# Altium PCB Audio_output.PcbDoc
Units mm, origin at the board's own origin, x right, y up, seen from the top; angles counter-clockwise.
Board outline 45 x 50 mm, 2 copper layers (Top Layer, Bottom Layer); 11 components, 9 nets, 56 pads, 0 vias.
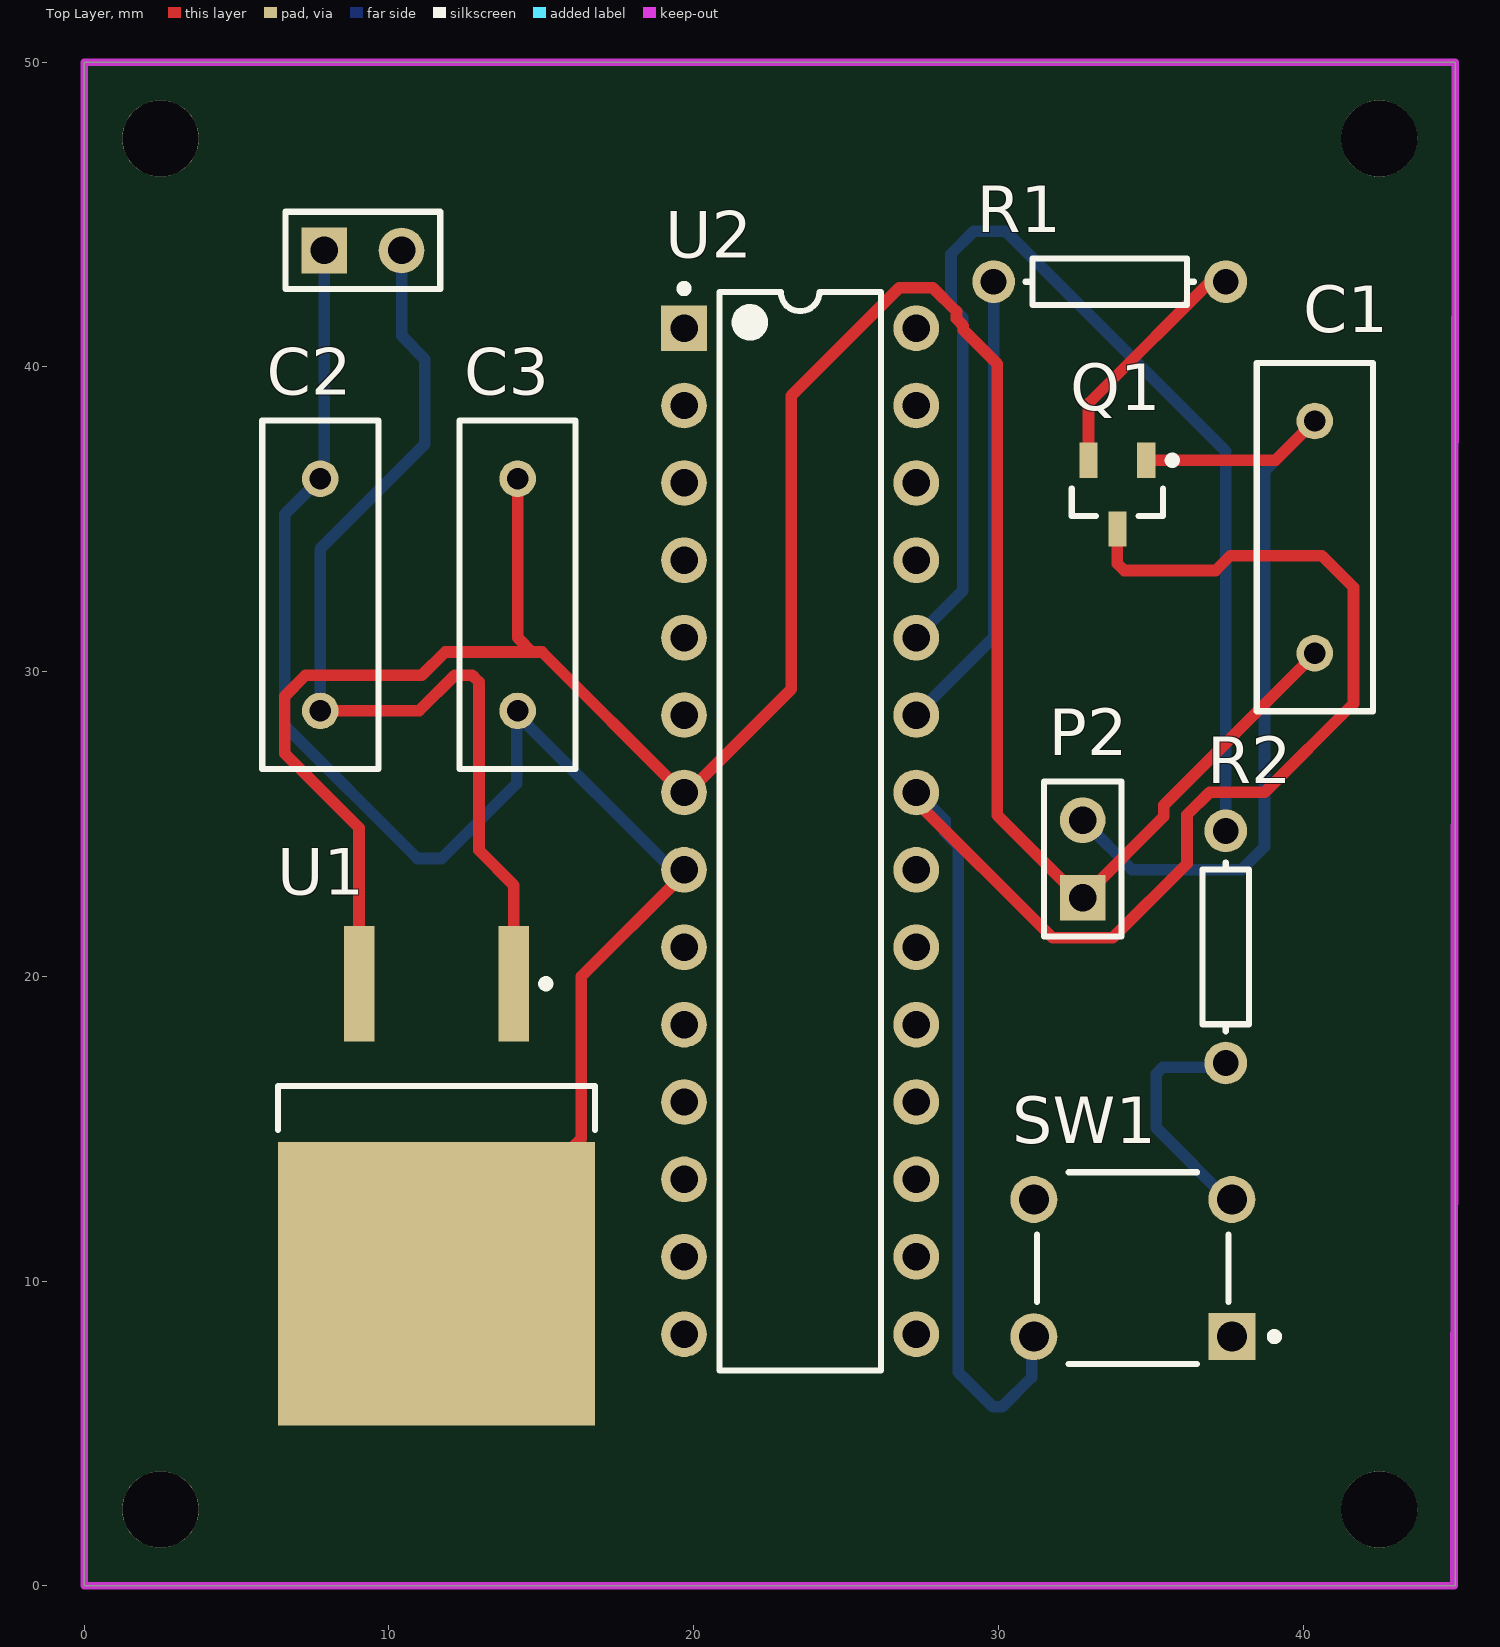
[diagram p0: Top Layer view]
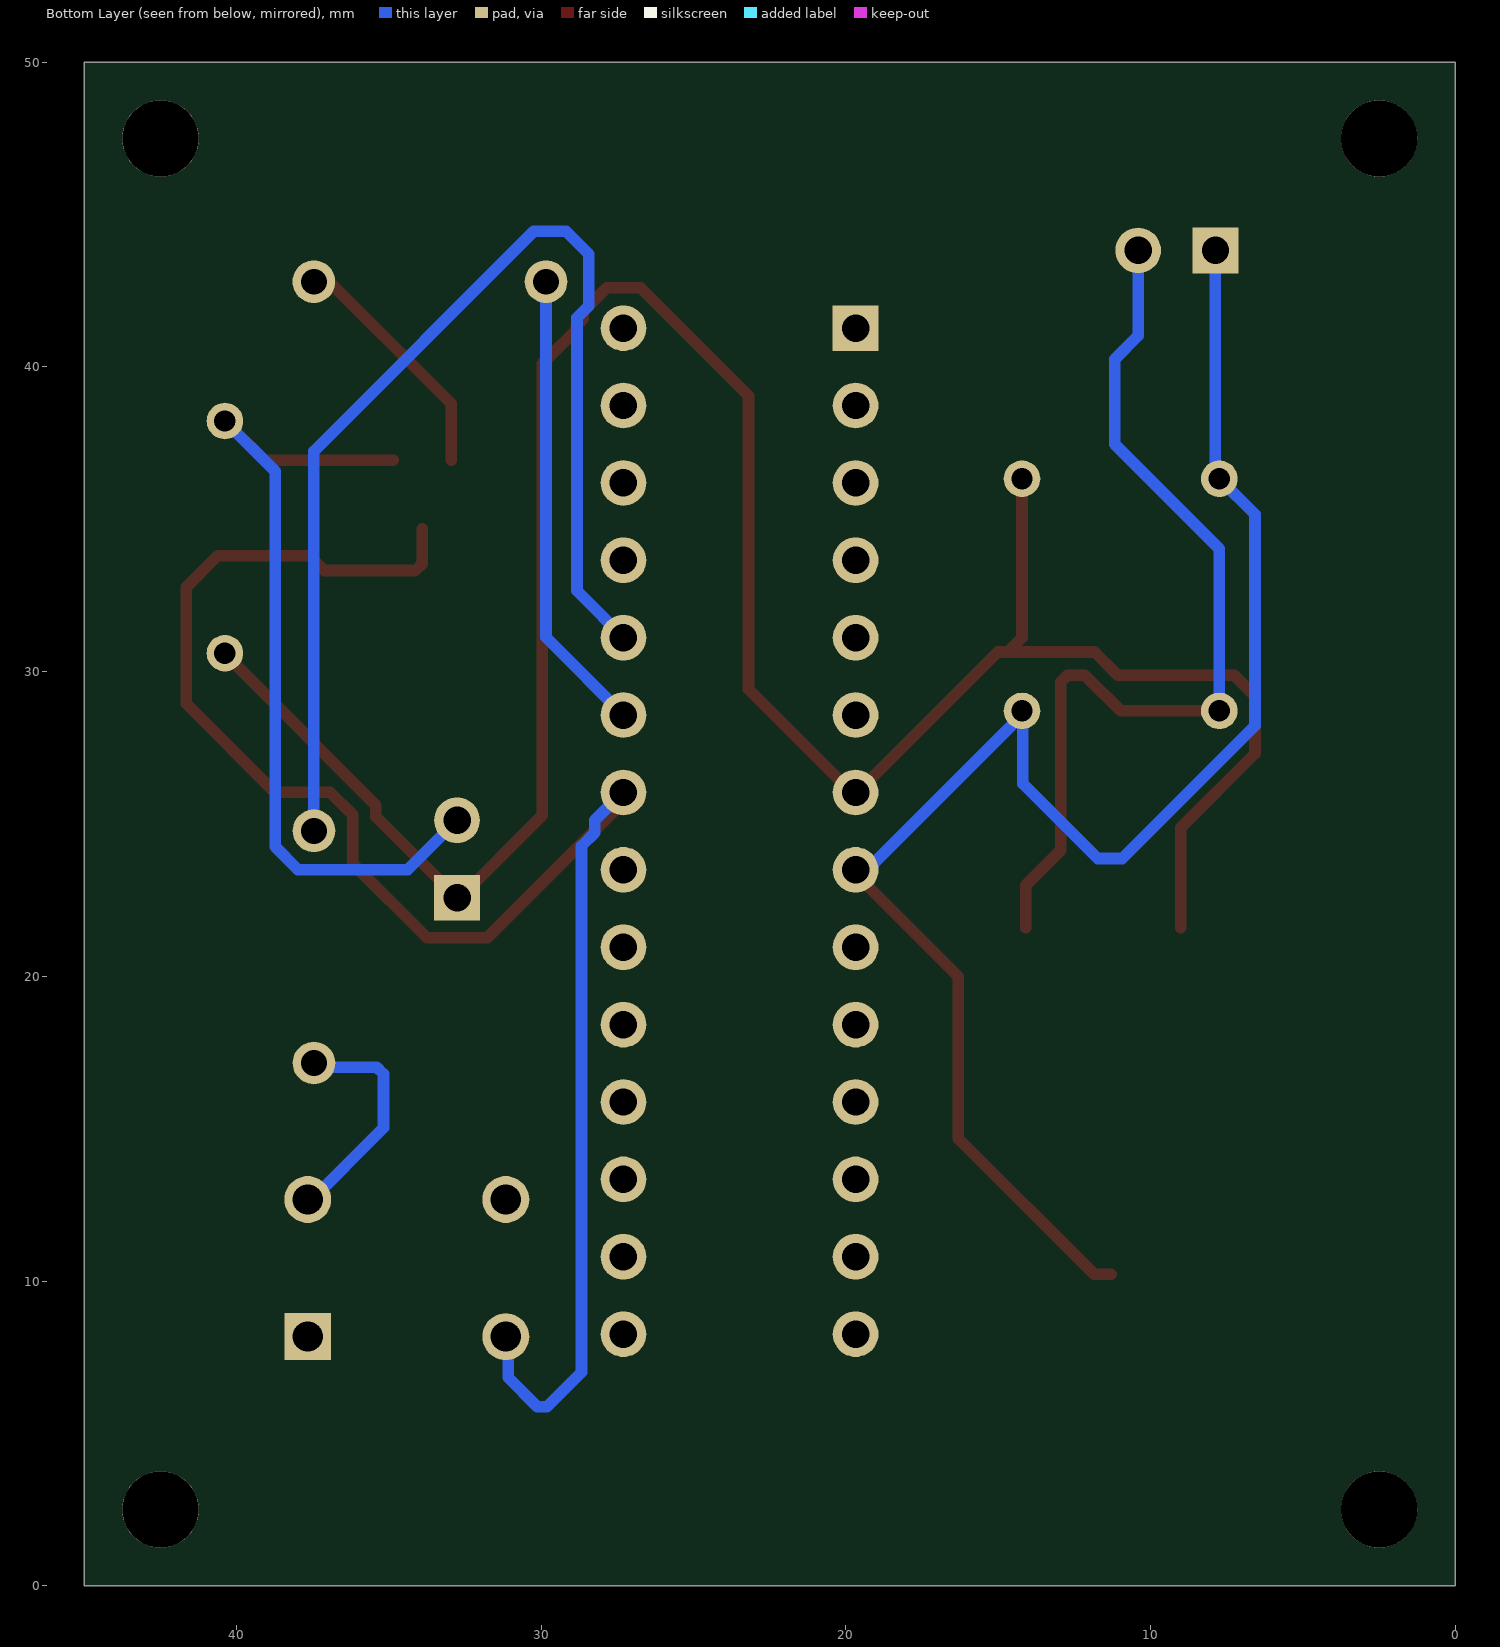
[diagram p1: Bottom Layer view, seen from below]

## Layer stack, top to bottom
Top Solder: solder mask 0.0102, Solder Resist, Dk 3.5
Top Layer: signal copper 0.0356
Dielectric 1: dielectric 0.32, FR-4, Dk 4.8
Bottom Layer: signal copper 0.0356
Bottom Solder: solder mask 0.0102, Solder Resist, Dk 3.5

## Board outline
0,0 0,50 45,50 45,0

## Design rules (kind name [scope] priority, off if disabled: settings)
AssemblyTestPointUsage [All] p1: valid=2
Clearance [All] p1: gap=0.381 ignorepadtopadclearanceinfootprint=FALSE except(0.508: Arc-Hole Track-Hole SMDPad-Hole THPad-Hole Via-Hole Fill-Hole Poly-Hole Region-Hole Text-Hole)
ComponentClearance [All] p1: gap=0.254 collisioncheckmode=3 verticalgap=0.508 showdistances=FALSE
FabricationTestPointUsage [All] p1: valid=2 allowmultiple=FALSE
MinimumAnnularRing [All] p1: minimumring=0.254
PolygonConnect [All] p1: connectstyle=Relief reliefconductorwidth=0.254 reliefentries=4 polygonreliefangle="90 Angle" airgapwidth=0.254
RoutingVias [All] p1: holewidth=0.711 width=1.27 viastyle="Through Hole" minholewidth=0.711 minwidth=1.27 maxholewidth=0.711 maxwidth=1.27
SilkToSolderMaskClearance [IsPad] p1: minsilkscreentomaskgap=0.127 clearancetoexposedcopper=TRUE
SolderMaskExpansion [All] p1: expansion=0.102 istentingtop=FALSE
UnRoutedNet [All] p1: checkbadconnections=TRUE
Width [All] p1: maxlimit=0.635 minlimit=0.381 preferedwidth=0.508
25 further rules are at their usual default settings.

## Classes and differential pairs
component class audio_output: "  " C1 C2 C3 P2 Q1 R1 R2 SW1 U2

## Components (designator, comment, footprint, x,y, rotation, side; value= is the part's Value field where it differs from the comment)
C1 "Cap" RAD-0.3#1 40.386,34.417 r90 top value=100nF
C2 "Cap" RAD-0.3#2 7.745,32.523 r90 top value=300nF
C3 "Cap" RAD-0.3#2 14.222,32.523 r90 top value=100nF
P2 "SPEAKER" HDR1X2 32.766,22.583 r90 top
Q1 "NPN" SOT-23B_N 33.909,35.814 r270 top
R1 "Res1" AXIAL-0.3 33.655,42.799 r0 top value=470
R2 "Res1" AXIAL-0.3 37.463,20.966 r270 top value=10k
SW1 "" FP-1-1825910-0-MFG 34.415,10.425 r0 top
U1 "L7805CD2T-TR" TO-263_N 11.557,13.456 r270 top
U2 "ATmega328P-PU" 28P3 23.495,24.765 r0 top
? "POWER" HDR1X2 7.872,43.826 r0 top

## Footprints (in the part's own frame and the unit in brackets; to place one, negate y for a bottom-side part, rotate by r counter-clockwise, add the part's x,y. Pads: shape width x height; smd on the part's side, far side on the other; paste and mask are expansions set on the pad)
28P3 [mm] "28-Pin Plastic Dual In-Line Package (PDIP)"
  rect 1.5x1.5 hole 0.9: 1(-3.81,16.51)
  round 1.5 hole 0.9: 2(-3.81,13.97) 3(-3.81,11.43) 4(-3.81,8.89) 5(-3.81,6.35) 6(-3.81,3.81) 7(-3.81,1.27) 8(-3.81,-1.27) 9(-3.81,-3.81) 10(-3.81,-6.35) 11(-3.81,-8.89) 12(-3.81,-11.43) 13(-3.81,-13.97) 14(-3.81,-16.51) 15(3.81,-16.51) 16(3.81,-13.97) 17(3.81,-11.43) 18(3.81,-8.89) 19(3.81,-6.35) 20(3.81,-3.81) 21(3.81,-1.27) 22(3.81,1.27) 23(3.81,3.81) 24(3.81,6.35) 25(3.81,8.89) 26(3.81,11.43) 27(3.81,13.97) 28(3.81,16.51)
  silkscreen extent -3.93,-17.7 2.65,17.93, body extent -3.6,-17.65 3.6,17.65, height 4.58
AXIAL-0.3 [mm] "Axial Device, Thru-Hole; 2 Leads; 0.3 in Pin Spacing"
  round 1.4 hole 0.85: 1(-3.81,0) 2(3.81,0)
  silkscreen extent -2.77,-0.76 2.77,0.76
FP-1-1825910-0-MFG [mm]
  rect 1.54x1.54 hole 0.99 paste-1000 mask+0: 1(3.25,-2.25)
  round 1.54 hole 0.99 paste-1000 mask+0: 2(-3.25,-2.25) 3(3.25,2.25) 4(-3.25,2.25)
  silkscreen extent -3.15,-3.15 4.77,3.15, body extent -4.12,-3.24 4.12,3.24, height 0.25
HDR1X2 [mm] "Connector; Header; 2 Position"
  rect 1.5x1.5 hole 0.9: 1(0,0)
  round 1.5 hole 0.9: 2(2.54,0)
  silkscreen extent -1.27,-1.27 3.81,1.27
RAD-0.3#1 [mm] "Radial Cap, Thru-Hole; 2 Leads; 0.3 in Pin Spacing"
  round 1.2 hole 0.7: 1(-3.81,0)
  round 1.2 hole 0.7 mask+0.102: 2(3.81,0)
  silkscreen extent -5.71,-1.91 5.71,1.91
RAD-0.3#2 [mm] "Radial Cap, Thru-Hole; 2 Leads; 0.3 in Pin Spacing"
  round 1.2 hole 0.7: 1(-3.81,0) 2(3.81,0)
  silkscreen extent -5.71,-1.91 5.71,1.91
SOT-23B_N [mm] "SOT23, 3-Leads, Body 2.9x1.3mm, Pitch 0.95mm, Lead Span 2.4mm, IPC Medium Density"
  rect 1.15x0.6 smd: 1(-1.125,0.95) 2(-1.125,-0.95) 3(1.125,0)
  silkscreen extent -1.25,-1.5 0.7,1.93, body extent -0.7,-1.5 0.7,1.5, height 1.14
TO-263_N [mm] "D2-PAK, 4-Leads, Body 9.2x10.2mm, Pitch 2.54mm, Lead Span 15.4mm, IPC Medium Density"
  rect 3.8x1 smd: 1(-6.3,2.54) 3(-6.3,-2.54)
  rect 9.3x10.4 smd: 4(3.55,0)
  silkscreen extent -6.42,-5.2 -1.5,5.2, body extent -2.95,-5.2 6.4,5.2, height 4.6

## Part data
C1 C2 C3: "Capacitor", LatestRevisionDate=17-Jul-2002, LatestRevisionNote="Re-released for DXP Platform.", PackageDescription="Radial Cap, Thru-Hole; 2 Leads; 0.3 in Pin Spacing", PackageReference=RAD-0.3, Published=8-Jun-2000, Publisher="Altium Limited"
P2 ?: library part "Header 2", "Header, 2-Pin", LatestRevisionDate=17-Jul-2002, LatestRevisionNote="Re-released for DXP Platform.", Publisher="Altium Limited"
Q1: library part QNPN, "NPN Bipolar Transistor", LatestRevisionDate=29-May-2009, LatestRevisionNote="IPC-7351 Footprint Added.", PackageDescription="3-Pin SOT-23 Package 0.95 mm Pitch, 2.4 mm Lead Span", PackageReference=SOT-23B, PackageVersion=Aug-1999, Published=8-Jun-2000, Publisher="Altium Limited"
R1 R2: "Resistor", LatestRevisionDate=17-Jul-2002, LatestRevisionNote="Re-released for DXP Platform.", PackageDescription="Axial Device, Thru-Hole; 2 Leads; 0.3 in Pin Spacing", PackageReference=AXIAL-0.3, Published=8-Jun-2000, Publisher="Altium Limited"
SW1: library part CMP-03407-000018-1, "SWITCH TACTILE SPST-NO 0.05A 24V", Actuator Color=Blue, Contact Current Rating=50mA, Contact Resistance=100mR, Max Operating Temperature=85°C, Max Voltage Rating (DC)=24V, Min Operating Temperature=-35°C, Operating Force=1.56N, Package Quantity=750, Actuator Length=3.4mm, Actuator Material=Nylon, Actuator Type=Standard, Contact Material=Brass, Contact Plating=Silver, Depth=5.99mm, Electrical Life=100000Cycles, Illumination Type=Non-Illuminated, Length=5.99mm, Max Current Rating=50mA, Mechanical Life=100000Cycles, Mount="Through Hole", Orientation=Straight, Packaging="Loose Piece", Radiation Hardening=No, RoHS Compliant=Yes, Series="FSMJ, Alcoswitch", Switch Function=Off-Mom, Switch Travel=0.25mm, Termination="PC Pins", Throw Configuration=SPST, Type=Switch, Voltage Rating (DC)=24V
U1: library part CMP-0244-00213-1, "Positive Voltage Regulator, 3-Pin D2PAK, Tape and Reel", ComponentLink1Description="Manufacturer URL", ComponentLink1URL=http://www.st.com, ComponentLink2Description=Datasheet, ComponentLink2URL=http://www.st.com/internet/com/TECHNICAL_RESOURCES/TECHNICAL_LITERATURE/DATASHEET/CD00000444.pdf, DatasheetVersion=16/11/2011, PackageDescription="3-Pin Transistor Outline Package 2.54 mm Pitch, 15.4 mm Lead Span (D2PAK)", PackageReference=TO-263, PackageVersion=2011
U2: library part CMP-0095-00013-2, "8-bit AVR Microcontroller, 32KB Flash, 1KB EEPROM, 2KB SRAM, 28-pin PDIP, Industrial Grade (-40°C to 85°C)", ComponentLink1Description="Manufacturer URL", ComponentLink1URL=http://www.atmel.com/, ComponentLink2Description="ATmega48A/48PA/88A/88PA/168A/168PA/328/328P Datasheet", ComponentLink2URL=http://www.atmel.com/dyn/resources/prod_documents/8271.pdf, ComponentLink3Description="ATmega48A/48PA/88A/88PA/168A/168PA/328/328P Summary", ComponentLink3URL=http://www.atmel.com/dyn/resources/prod_documents/8271S.pdf, DatasheetVersion="revD, May-2011", PackageDescription="28-lead (0.300\"/7.62mm Wide) Plastic Dual Inline Package (PDIP)", PackageReference=28P3, PackageVersion="revB, Sep-2001", RevisionNote="DatasheetVersion updated. URLs added."

## Free pads (board coordinates)
  round 2.5 hole 2.5: 1(2.5,47.5) 2(42.5,47.5) 3(2.5,2.5) 4(42.5,2.5)

## Nets (pads, with @x,y where several pads share a name; then routed paths per layer and width w, separated by ;. In a path a pad name is that pad's centre, name@x,y a point inside that pad or via, vN(x,y) a via of type N, cw(c..) or ccw(c..) an arc to the next point about the centre after c; other vN are vias at no path point)
"Net  _1": ?.1 C2.2 C3.1 U1.4 U2.8 | length 53.1
  Top Layer w0.381: U1.4@11.303,10.216 11.853,10.216 16.312,14.676 16.312,19.995 U2.8@19.558,23.241
  Bottom Layer w0.381: C2.2 6.574,35.161 6.574,28.228 10.935,23.867 11.735,23.867 14.195,26.328 14.195,28.604 19.42,23.379 U2.8@19.556,23.379 ; C2.2@7.815,36.263 7.874,36.322 ?.1@7.874,43.688
"Net  _2": ?.2 C2.1 U1.1 | length 31.2
  Top Layer w0.381: C2.1 10.987,28.713 12.158,29.884 12.731,29.884 12.954,29.661 12.954,24.133 14.097,22.99 U1.1@14.097,21.59
  Bottom Layer w0.381: C2.1@7.747,28.575 7.747,34.038 11.176,37.467 11.176,40.259 10.414,41.021 ?.2@10.414,43.688
NetC1_1: C1.1 C3.2 P2.1 U1.3 U2.7 | length 84.1
  Top Layer w0.381: U1.3@9.017,21.59 9.017,24.873 6.574,27.316 6.574,29.198 7.26,29.884 11.081,29.884 11.843,30.646 14.693,30.646 ; C3.2@14.224,36.195 14.224,31.115 14.693,30.646 ; C1.1@40.132,30.32 35.43,25.618 35.43,25.247 P2.1 32.766,22.485 29.966,25.285 29.966,40.102 28.845,41.223 28.845,41.359 28.627,41.578 28.627,41.822 27.852,42.597 26.745,42.597 23.201,39.053 23.201,29.424 19.558,25.781 19.558,26.112 15.023,30.646 14.693,30.646
NetC1_2: C1.2 P2.2 Q1.1 | length 27.6
  Top Layer w0.381: Q1.1 39.098,36.939 C1.2
  Bottom Layer w0.381: P2.2@32.766,25.025 32.864,25.025 34.385,23.504 37.99,23.504 38.735,24.249 38.735,36.576 C1.2
NetQ1_2: Q1.2 R1.2 | length 8.1
  Top Layer w0.381: Q1.2 32.959,38.801 R1.2@37.338,43.18
NetQ1_3: Q1.3 SW1.2 U2.22 | length 58.5
  Top Layer w0.381: U2.22@27.176,25.919 27.176,25.865 31.779,21.262 33.753,21.262 36.192,23.701 36.192,25.303 36.937,26.047 38.747,26.047 41.656,28.956 41.656,32.772 40.617,33.811 37.62,33.811 37.129,33.319 34.132,33.319 33.909,33.542 Q1.3
  Bottom Layer w0.381: U2.22@27.176,25.919 27.454,25.919 28.25,25.123 28.25,24.709 28.682,24.277 28.682,7.005 29.814,5.873 30.13,5.873 31.09,6.833 31.09,8.1 SW1.2 ; U2.22@27.178,25.781 U2.22@27.275,25.878
NetR1_1: R1.1 U2.23 | length 15.6
  Bottom Layer w0.381: U2.23@27.176,28.459 29.845,31.127 29.845,42.416 R1.1@29.462,42.799
NetR2_1: R2.1 U2.24 | length 38.3
  Bottom Layer w0.381: U2.24@27.176,30.999 28.829,32.651 28.829,41.62 28.446,42.002 28.446,43.707 29.191,44.452 30.245,44.452 37.463,37.233 R2.1
NetR2_2: R2.2 SW1.3 | length 7.7
  Bottom Layer w0.381: R2.2@37.465,17.018 35.402,17.018 35.179,16.795 35.179,15.025 SW1.3@37.667,12.537
pads on no net: SW1.1 SW1.4 U2.1 U2.2 U2.3 U2.4 U2.5 U2.6 U2.9 U2.10 U2.11 U2.12 U2.13 U2.14 U2.15 U2.16 U2.17 U2.18 U2.19 U2.20 U2.21 U2.25 U2.26 U2.27 U2.28

## Keep-outs
Top Layer:
  lines w0.254: 44.958,50 0,50 0,0 44.958,0 45,50